# Altium PCB SG_CAN_Board.PcbDoc (part 2 of 2)
Units mil, origin at the board's own origin, x right, y up, seen from the top; angles counter-clockwise.
Board outline 3500 x 2800 mil, 4 copper layers (Top Layer, Int1 (GND), Int2 (PWR), Bottom Layer), stack 53.911 mil thick; 153 components, 115 nets, 475 pads, 128 vias.
Unrouted connection lines stored in the file: 15.
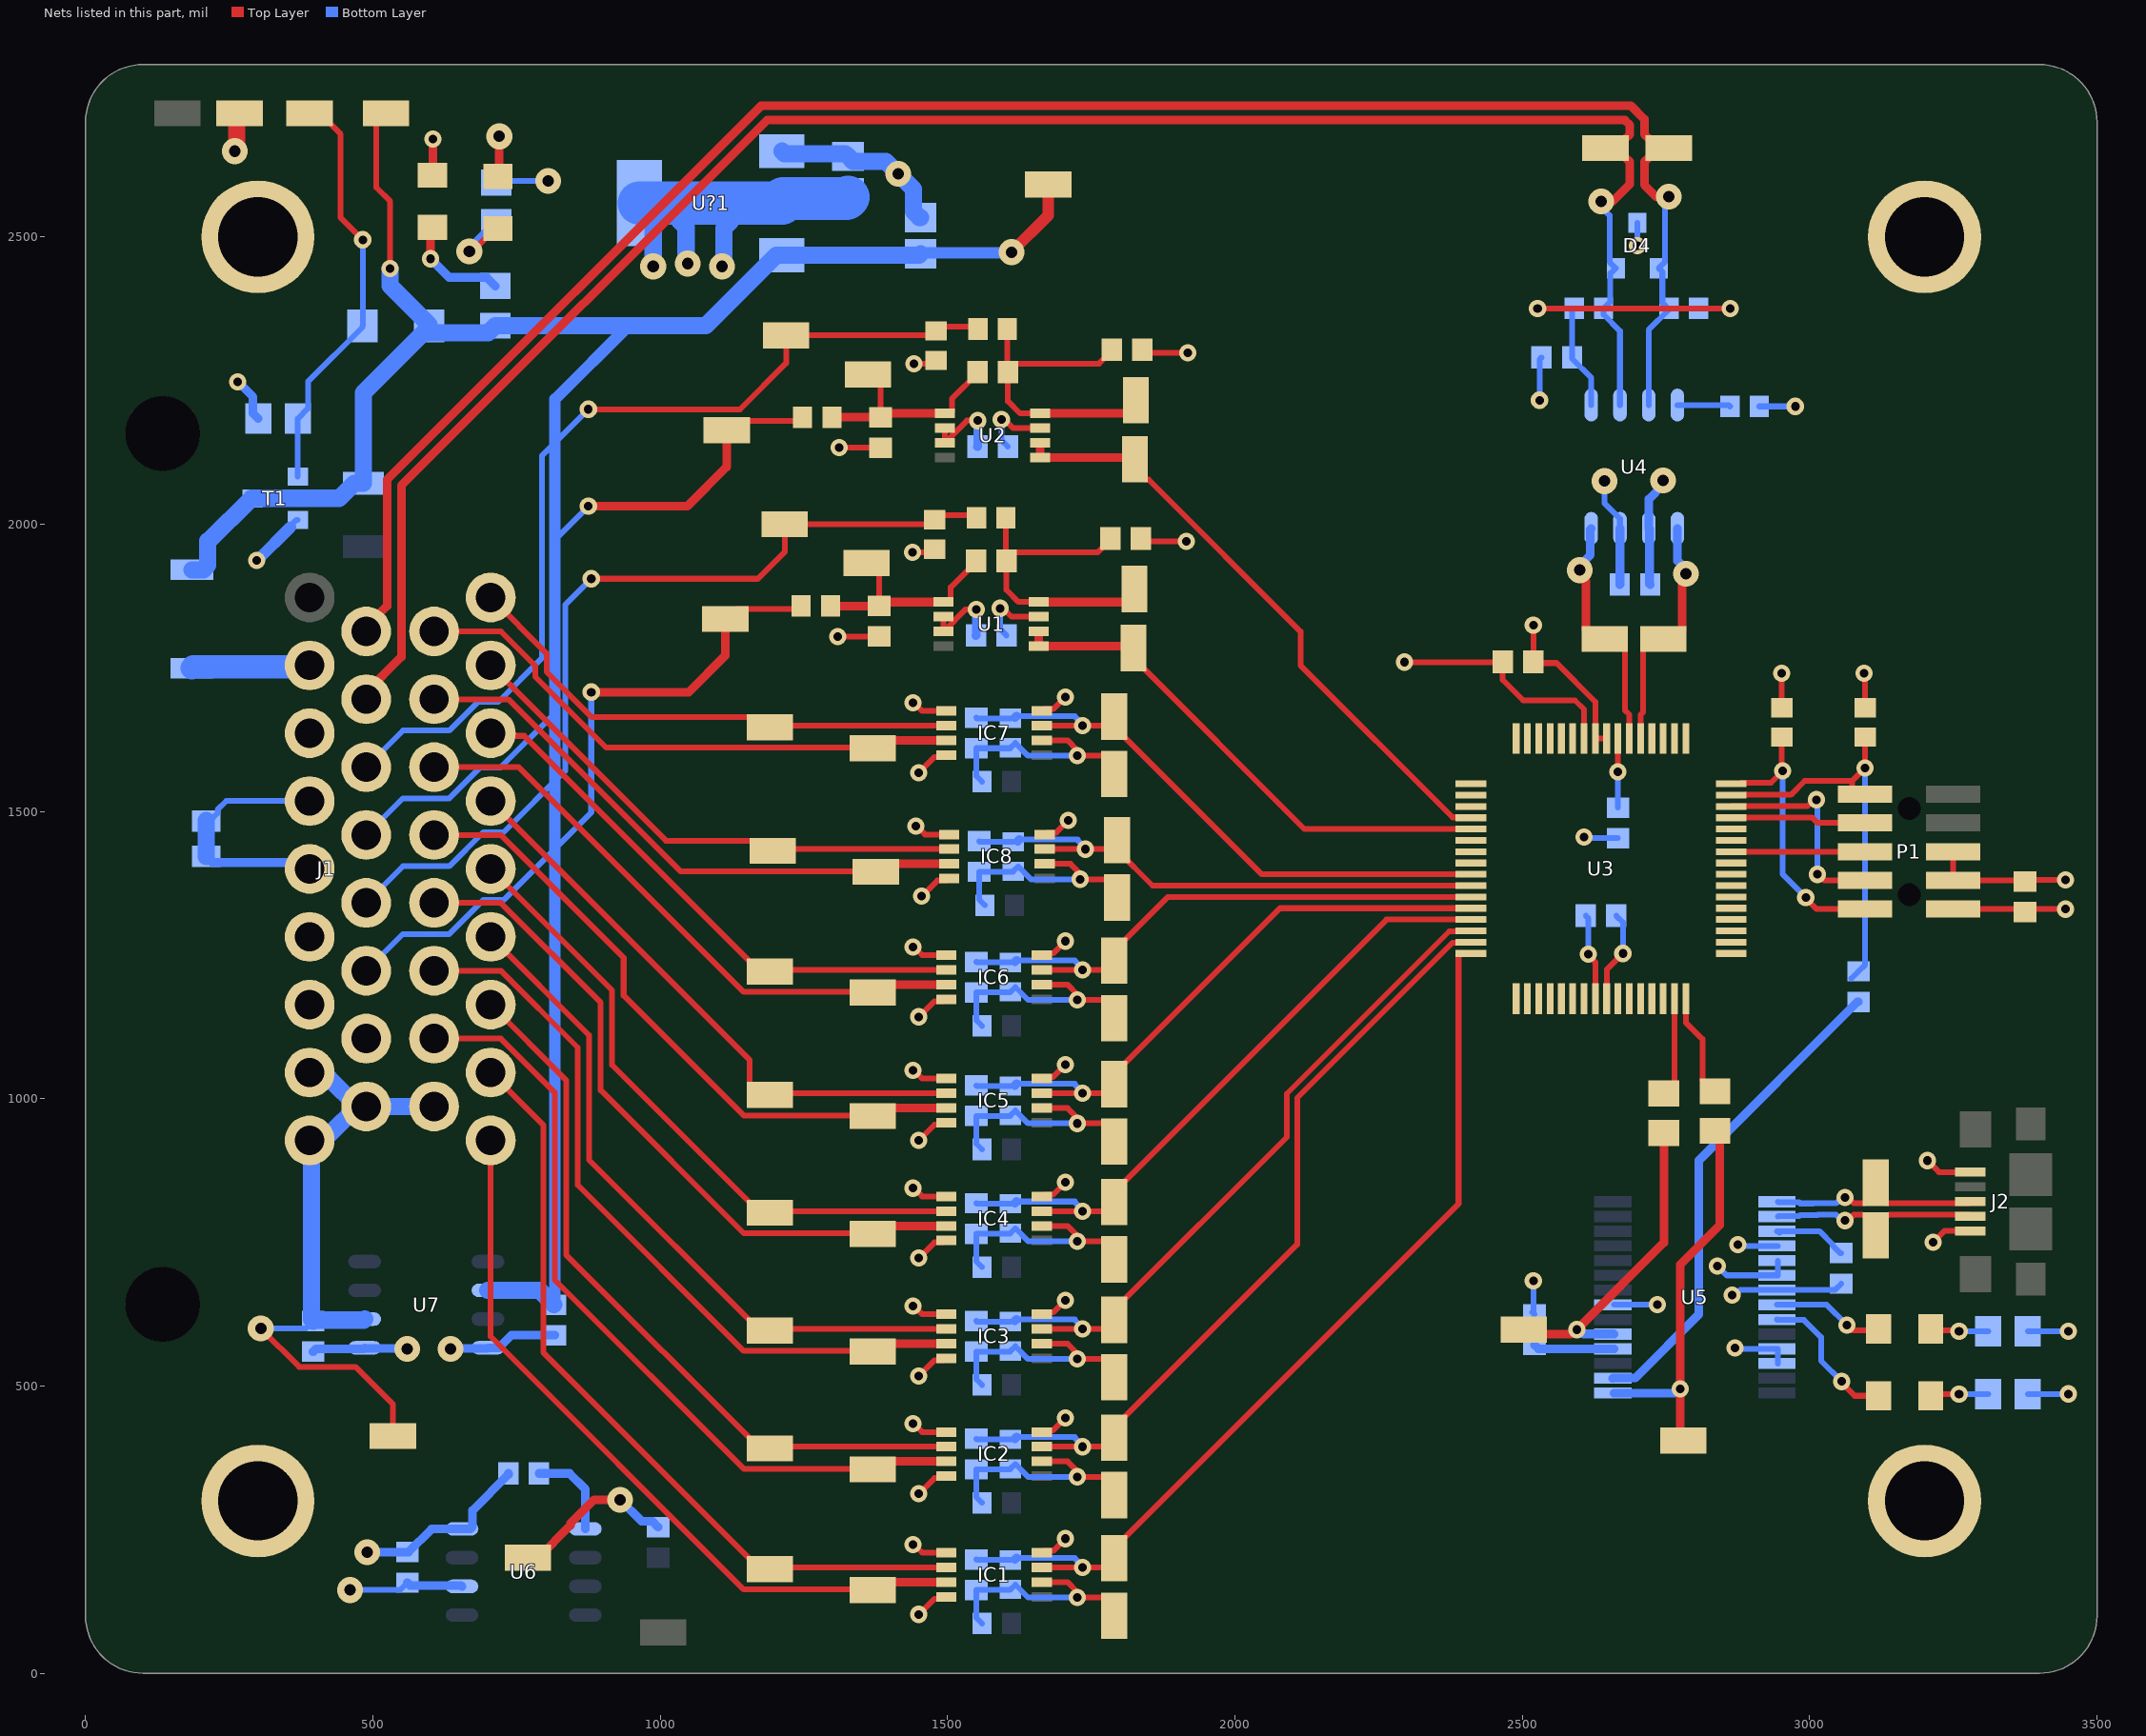
[diagram p4: the nets of this part, all layers, seen from the top]

## Via types
v1: diameter 30, hole 15, Top Layer to Bottom Layer, 106 vias
v2: diameter 45, hole 20, Top Layer to Bottom Layer, 22 vias

## Nets (pads, with @x,y where several pads share a name; then routed paths per layer and width w, separated by ;. In a path a pad name is that pad's centre, name@x,y a point inside that pad or via, vN(x,y) a via of type N, cw(c..) or ccw(c..) an arc to the next point about the centre after c; other vN are vias at no path point) (continued)
+12: 12V.1 C16.2 C31.2 D5.2 D6.2 F1.2 R33.2 T1.3 TP47.1 U7.2 U?1.3 | length 4223.1
  Top Layer w10: 12V.1@522.68,2715 506.08,2698.4 506.08,2585.85 530,2561.92 v1(530,2445)
  Top Layer w20: v2(1611.1,2473.44) 1675,2537.34 TP47.1@1675,2591.38
  Bottom Layer w20: C16.2@814.99,641.5 C16.2@816.96,641.5 818.92,641.5 816.96,643.47 816.96,2217.51 945,2345.55 ; C31.2@1453.01,2470.83 1454.32,2472.14 1609.79,2472.14 v2(1611.1,2473.44)
  Bottom Layer w30: D6.2@185,1920.63 204.68,1920.63 212.4,1928.35 212.4,1970.64 214.3,1970.64 288.66,2045 T1.3@290.63,2045 441.44,2045 467.56,2071.12 F1.2@483.31,2071.12 483.31,2228.27 598.07,2343.03 D5.2@598.07,2345 598.07,2346.97 530,2415.04 v1(530,2445) ; D5.2@598.07,2332.91 700.25,2332.91 R33.2@712.89,2345.55 945,2345.55 1079.39,2345.55 1201.95,2468.11 U?1.3@1211.79,2468.11 ; U7.2@700.28,666.57 789.91,666.57 C16.2@814.99,641.5 ; U?1.3@1213.11,2468.11 1450.3,2468.11 C31.2@1453.01,2470.83
+IN_U_ThermoAmp1: C4.2 C6.1 R6.1 TP27.1 U2.8 | length 570.5
  Top Layer w10: R6.1@1603.95,2339.63 1603.95,2265.62 C4.2@1604.93,2264.63 ; U2.8@1661.25,2193.02 1626,2193.02 1604.93,2214.08 C4.2@1604.93,2264.63 ; C6.1@1785.9,2303.56 1785.9,2301.59 1763.62,2279.32 1617.65,2279.32 1604.93,2266.6 C4.2@1604.93,2264.63
  Top Layer w15: U2.8@1661.25,2193.02 1812.33,2193.02 1827.47,2208.16 TP27.1@1827.47,2215.74
+IN_U_ThermoAmp2: C3.2 C5.1 R5.1 TP25.1 U1.8 | length 570.5
  Top Layer w10: R5.1@1601.48,2011.07 1601.48,1937.06 C3.2@1602.46,1936.07 ; U1.8@1658.78,1864.46 1623.53,1864.46 1602.46,1885.52 C3.2@1602.46,1936.07 ; C5.1@1783.43,1975 1783.43,1973.03 1761.15,1950.76 1615.18,1950.76 1602.46,1938.04 C3.2@1602.46,1936.07
  Top Layer w15: U1.8@1658.78,1864.46 1809.86,1864.46 1825,1879.6 TP25.1@1825,1887.18
-IN_U_ThermoAmp1: C2.2 C4.1 R2.2 TP15.1 U2.1 | length 399.4
  Top Layer w10: TP15.1@1361.64,2260.71 1365.72,2260.71 1383.36,2243.07 1383.36,2193.02 C2.2@1383.36,2186.21 ; U2.1@1495.47,2193.02 U2.1@1504.7,2193.02 ; C4.1@1551.78,2264.63 1551.78,2262.66 1507.97,2218.85 U2.1@1507.97,2196.29 ; U2.1@1504.7,2193.02 U2.1@1507.97,2196.29 ; U2.1@1504.7,2193.02 U2.1@1507.97,2196.29 ; U2.1@1504.7,2193.02 U2.1@1507.97,2196.29 ; U2.1@1504.7,2193.02 U2.1@1507.97,2196.29
  Top Layer w15: R2.2@1298.95,2186.21 C2.2@1383.36,2186.21 1390.17,2193.02 U2.1@1495.47,2193.02
-IN_U_ThermoAmp2: C1.2 C3.1 R1.2 TP14.1 U1.1 | length 385.6
  Top Layer w10: TP14.1@1359.17,1932.15 1363.25,1932.15 1380.89,1914.52 1380.89,1864.46 C1.2@1380.89,1857.65 ; U1.1@1493,1864.46 1502.23,1864.46 1505.5,1867.73 1505.5,1890.29 1549.31,1934.11 C3.1@1549.31,1936.07
  Top Layer w15: R1.2@1296.48,1857.65 C1.2@1380.89,1857.65 1387.7,1864.46 U1.1@1493,1864.46
AGND: C1.1 C2.1 C5.2 C6.2 C7.1 C10.1 C13.1 C16.1 C17.1 C20.1 C21.1 C22.1 IC1.1 IC1.4 IC2.1 IC2.4 IC3.1 IC3.4 IC4.1 IC4.4 IC5.1 IC5.4 IC6.1 IC6.4 IC7.1 IC7.4 IC8.1 IC8.4 J1.A24 J1.A30 J1.A31 J1.A32 N1.1 R3.1 R4.1 TP44.1 U1.2 U1.3 U2.2 U2.3 U3.10 U6.4 U7.4 U7.5 | length 3265.3
  Top Layer w10: v1(1308.64,1804.5) C1.1@1380.89,1804.5 ; v1(1311.11,2133.06) C2.1@1383.36,2133.06 ; v1(1438.85,1950.76) 1471.49,1950.76 R3.1@1477.3,1956.56 ; v1(1440,224.36) 1441.45,224.36 1455.86,209.96 IC1.1@1498.09,209.96 ; v1(1440,434.36) 1441.45,434.36 1455.86,419.96 IC2.1@1498.09,419.96 ; v1(1440,639.36) 1441.45,639.36 1455.86,624.96 IC3.1@1498.09,624.96 ; v1(1440,844.36) 1441.45,844.36 1455.86,829.96 IC4.1@1498.09,829.96 ; v1(1440,1049.36) 1441.45,1049.36 1455.86,1034.96 IC5.1@1498.09,1034.96 ; v1(1440,1264.36) 1441.45,1264.36 1455.86,1249.96 IC6.1@1498.09,1249.96 ; v1(1440,1689.36) 1441.45,1689.36 1455.86,1674.96 IC7.1@1498.09,1674.96 ; v1(1441.32,2279.32) 1473.96,2279.32 R4.1@1479.77,2285.12 ; v1(1445,1474.36) 1446.45,1474.36 1460.86,1459.96 IC8.1@1503.09,1459.96 ; v1(1450,102.59) 1477.32,129.92 1494.82,129.92 IC1.4@1498.09,133.19 ; v1(1450,312.59) 1477.32,339.92 1494.82,339.92 IC2.4@1498.09,343.19 ; v1(1450,517.59) 1477.32,544.92 1494.82,544.92 IC3.4@1498.09,548.19 ; v1(1450,722.59) 1477.32,749.92 1494.82,749.92 IC4.4@1498.09,753.19 ; v1(1450,927.59) 1477.32,954.92 1494.82,954.92 IC5.4@1498.09,958.19 ; v1(1450,1142.59) 1477.32,1169.92 1494.82,1169.92 IC6.4@1498.09,1173.19 ; v1(1450,1567.59) 1477.32,1594.92 1494.82,1594.92 IC7.4@1498.09,1598.19 ; v1(1455,1352.59) 1482.32,1379.92 1499.82,1379.92 IC8.4@1503.09,1383.19 ; U1.2@1493,1838.87 U1.3@1493,1813.28 1531.38,1851.66 v1(1550.3,1851.66) ; U2.2@1495.47,2167.43 U2.3@1495.47,2141.84 1533.85,2180.22 v1(1552.77,2180.22) ; C5.2@1836.57,1975 1841.57,1970 v1(1915.22,1970) ; C6.2@1839.04,2303.56 1844.04,2298.56 v1(1917.69,2298.56) ; v1(2295,1759.97) 2465.69,1759.97 C7.1@2466.07,1760.35 2466.07,1728.92 2501.65,1693.35 2591.65,1693.35 2607.49,1677.51 U3.10@2607.49,1626.85
  Top Layer w15: TP44.1@770,201.34 787.72,201.34 843.93,257.55 843.93,261.05 885,302.12 v2(930,302.12)
  Top Layer w30: J1.A24@477.59,1115.56 J1.A24@488.43,1104.72
  Bottom Layer w15: N1.1@210,1422.2 221.1,1411.1 378.9,1411.1 J1.A30@390,1400 ; C20.1@396.03,559.88 401.07,564.93 484.06,564.93 U7.5@485.71,566.57 486.77,565.52 558.94,565.52 v2(560,564.46) ; v2(490,210.94) C10.1@560,210.94 561.97,210.94 602.37,251.34 U6.4@655.1,251.34 669.5,251.34 673.48,255.32 673.48,283.62 735.81,345.95 C13.1@735.81,347.91 ; v2(635,564.46) 636.06,565.52 699.22,565.52 U7.4@700.28,566.57 719.34,566.57 741.12,588.35 C16.1@816.96,588.35 ; v2(930,302.12) 967.42,264.71 986.14,264.71 C17.1@996.36,254.49 ; C22.1@1549.31,1806.39 1549.81,1806.88 1549.81,1851.17 v1(1550.3,1851.66) ; C21.1@1551.78,2134.95 1552.28,2135.44 1552.28,2179.73 v1(1552.77,2180.22)
CAN_N: CANH.1 D4.2 J1.A19 R14.1 U4.6 | length 3413.7
  Top Layer w15: J1.A19@488.43,1695.28 488.43,1707.75 549.73,1769.05 549.73,2067.18 1185.9,2703.36 2678.53,2703.36 2687.32,2694.57 2687.32,2678.36 2678.53,2669.57 2659.77,2669.57 CANH.1@2644.63,2654.43 2659.77,2639.3 2678.53,2639.3 2687.32,2630.51 2687.32,2591.83 2657.32,2561.83 v2(2637.01,2561.83)
  Bottom Layer w10: v2(2637.01,2561.83) 2637.01,2552.36 2651.85,2537.52 2651.85,2456.38 D4.2@2662.6,2445.63 2653.35,2436.38 2653.35,2387.37 R14.1@2641.62,2375.64 2641.62,2364.49 2670,2336.11 U4.6@2670,2207.28
  Bottom Layer w15: v2(2637.01,2561.83) v2@2639.32,2559.53
CAN_P: CANL.1 D4.1 J1.A18 R15.2 U4.7 | length 3361.5
  Top Layer w15: J1.A18@488.43,1813.39 488.43,1821.42 524.73,1857.72 524.73,2077.54 1175.55,2728.36 2688.88,2728.36 2712.32,2704.93 2712.32,2678.36 2721.1,2669.57 2739.86,2669.57 CANL.1@2755,2654.43 2739.86,2639.3 2721.1,2639.3 2712.32,2630.51 2712.32,2590.45 2732.76,2570 v2(2755,2570)
  Bottom Layer w10: U4.7@2720,2207.28 2720,2338.23 2755.44,2373.67 2743.7,2385.4 2743.7,2439.33 D4.1@2737.4,2445.63 2748.15,2456.38 2748.15,2553.68 2755,2560.53 v2(2755,2570)
  Bottom Layer w15: v2(2755,2570) v2@2755.22,2569.78
D_N: J2.2 TEST_USBD_N1.1 U5.16 | length 378.1
  Top Layer w10: v1(3061.47,788.02) 3066.88,788.02 3076.88,798.02 3091.5,798.02 3091.88,797.64 3097.36,797.64 TEST_USBD_N1.1@3115,780.01 ; TEST_USBD_N1.1@3115,762.29 TEST_USBD_N1.1@3115,780.01 ; J2.2@3279.69,795.39 3276.97,798.11 3246.9,798.11 3246.82,798.19 3226.82,798.19 3226.65,798.02 3138.5,798.02 3138.12,797.64 3132.64,797.64 TEST_USBD_N1.1@3115,780.01
  Bottom Layer w10: U5.16@2945,795 2945.94,795.94 2981.55,795.94 2983.4,797.8 3014.39,797.8 3014.62,798.02 3046.06,798.02 3056.06,788.02 v1(3061.47,788.02)
D_P: J2.3 TEST_USBD_P1.1 U5.15 | length 378.1
  Top Layer w10: v1(3061.47,828.02) 3066.88,828.02 3076.88,818.02 3091.5,818.02 3091.88,818.4 3097.36,818.4 TEST_USBD_P1.1@3115,836.04 ; TEST_USBD_P1.1@3115,853.76 TEST_USBD_P1.1@3115,836.04 ; J2.3@3279.69,820.98 3276.97,818.27 3246.9,818.27 3246.82,818.19 3218.53,818.19 3218.37,818.02 3138.5,818.02 3138.12,818.4 3132.64,818.4 TEST_USBD_P1.1@3115,836.04
  Bottom Layer w10: U5.15@2945,820.59 2945.94,819.65 2981.55,819.65 2983.4,817.8 3006.11,817.8 3006.34,818.02 3046.06,818.02 3056.06,828.02 v1(3061.47,828.02)
DGND: C8.1 C9.1 C11.1 C12.1 C14.1 C15.1 C18.1 C31.1 C32.1 D1.2 D4.3 D6.1 J1.A27 J1.A28 J1.A29 J2.5 N1.2 P1.3 P1.5 pad.1 POW.2 R13.1 R34.1 T1.2 U3.40 U4.2 U5.7 U5.18 U5.21 U5.25 U5.26 U?1.1 | length 2450.2
  Top Layer w10: v1(2615.1,1251.93) 2615.1,1249.96 2627.17,1237.88 U3.40@2627.17,1174.09 ; v1(3205,892.36) 3225.19,872.17 J2.5@3279.69,872.17 ; P1.5@3250,1430 P1.3@3250,1380 3372.48,1380 C8.1@3374.65,1377.83 3377.6,1380.79 v1(3445,1380.79)
  Top Layer w15: POW.2@603.58,2607.2 604.35,2607.97 v1(604.35,2670.51) ; D1.2@717.59,2605.28 720,2607.69 v2(720,2675)
  Bottom Layer w10: N1.2@210,1483.22 215.91,1483.22 229.61,1496.92 229.61,1502.83 244.89,1518.11 J1.A29@390,1518.11 ; v1(297.6,1937.22) v1@299,1937.22 ; T1.2@356.65,1994.88 356.65,1996.85 367.4,2007.6 T1.2@369.37,2007.6 ; v1(2519.22,683.26) 2519.22,630.6 2517.29,628.66 C18.1@2521.14,624.8 ; v1(2530,2215.74) 2530,2286.66 C12.1@2533.51,2290.16 ; v1(2607.49,1455.35) 2609.41,1453.43 C14.1@2666.54,1453.43 ; C15.1@2610.44,1318.58 2615.1,1313.92 v1(2615.1,1251.93) ; U5.7@2659.57,641.46 v1(2735,641.46) ; v1(2700,2485) D4.3@2700,2524.37 ; v1(2865,658.23) 2870.41,658.23 2879.23,667.05 U5.21@2942.85,667.05 3043.82,667.05 C11.1@3055,678.23 ; v1(2870.41,566.45) 2872.18,564.69 U5.25@2942.85,564.69 2945,564.69 U5.26@2945,539.09 ; v1(2875,746.38) 2877.57,743.82 U5.18@2942.85,743.82 U5.18@2945,743.82 ; R13.1@2912.6,2205 v1(2975,2205)
  Bottom Layer w15: v1(265,2248.01) 291.52,2221.49 291.52,2192.81 R34.1@300.55,2183.78 ; C9.1@2722.64,1895 2721.32,1896.32 2721.32,1991.39 2720.34,1992.38 2720.34,2043.76 2744.73,2068.15 v2(2744.73,2076.27)
  Bottom Layer w20: v1@299,1937.22 T1.2@356.65,1994.88
  Bottom Layer w30: U?1.1@1211.79,2649.21 1216.32,2644.68 1322.29,2644.68 C32.1@1326.81,2640.16 1335.41,2631.57 1392.29,2631.57 v2(1413.85,2610) 1440.46,2583.4 1440.46,2544.41 1451.05,2533.82 C31.1@1453.01,2533.82
  Bottom Layer w40: D6.1@185,1749.37 187.28,1751.65 387.32,1751.65 J1.A27@390,1754.33
DVCC_5V: C7.2 C8.2 C9.2 C10.2 C14.2 C15.2 C18.2 C21.2 C22.2 C32.2 IC1.8 IC2.8 IC3.8 IC4.8 IC5.8 IC6.8 IC7.8 IC8.8 J2.1 P1.1 R9.2 R10.2 R11.2 R12.2 R32.1 TP1.1 U1.7 U2.7 U3.7 U3.8 U3.9 U3.41 U4.3 U5.4 U5.19 U5.20 U6.2 U?1.2 U?1.THM | length 3255.9
  Top Layer w10: v1(1591.12,1853.59) 1596.54,1853.59 1611.26,1838.87 U1.7@1658.78,1838.87 ; v1(1593.59,2182.15) 1599.01,2182.15 1613.73,2167.43 U2.7@1661.25,2167.43 ; IC1.8@1663.88,209.96 1667.07,213.15 1683.79,213.15 v1(1705,234.36) ; IC2.8@1663.88,419.96 1667.07,423.15 1683.79,423.15 v1(1705,444.36) ; IC3.8@1663.88,624.96 1667.07,628.15 1683.79,628.15 v1(1705,649.36) ; IC4.8@1663.88,829.96 1667.07,833.15 1683.79,833.15 v1(1705,854.36) ; IC5.8@1663.88,1034.96 1667.07,1038.15 1683.79,1038.15 v1(1705,1059.36) ; IC6.8@1663.88,1249.96 1667.07,1253.15 1683.79,1253.15 v1(1705,1274.36) ; IC7.8@1663.88,1674.96 1667.07,1678.15 1683.79,1678.15 v1(1705,1699.36) ; IC8.8@1668.88,1459.96 1672.07,1463.15 1688.79,1463.15 v1(1710,1484.36) ; v1(2519.22,1823.97) C7.2@2519.22,1760.35 2521.22,1758.35 2559.65,1758.35 2627.17,1690.82 U3.9@2627.17,1626.85 U3.8@2646.86,1626.85 ; U3.41@2646.86,1174.09 2646.86,1224.69 v1(2675,1252.83) ; v1(2666.54,1568.78) U3.7@2666.54,1626.85 ; R9.2@2951.51,1680.47 v1(2951.51,1740.83) ; v1(3094.65,1740.83) 3096.46,1739.02 R10.2@3096.46,1680.47 ; v1(3215,750.4) 3234.41,769.8 J2.1@3279.69,769.8 ; P1.1@3250,1330 3369.33,1330 C8.2@3374.65,1324.69 3379.96,1330 v1(3445,1330)
  Top Layer w30: v2(260,2649.21) 262.87,2652.08 262.87,2709.8 TP1.1@268.07,2715
  Bottom Layer w10: v2(460,145) 497.5,145 497.58,145.08 547.28,145.08 C10.2@560,157.79 ; R32.1@715,2594.45 717.95,2597.4 v2(805,2597.4) ; v1(1591.12,1853.59) 1591.12,1817.73 C22.2@1602.46,1806.39 ; v1(1593.59,2182.15) 1593.59,2146.29 C21.2@1604.93,2134.95 ; v2(2642.92,2075) 2642.92,2036.53 2670,2009.45 U4.3@2670,1992.72 ; C15.2@2663.59,1318.58 2675,1307.17 v1(2675,1252.83) ; C14.2@2666.54,1506.57 v1(2666.54,1568.78) ; v1(2839.61,708.9) 2855.87,692.64 U5.20@2942.85,692.64 ; U5.20@2945,692.64 U5.19@2945,718.23 ; R11.2@3379.45,486.26 v1(3450,486.26) ; R12.2@3379.45,595 v1(3450,595)
  Bottom Layer w15: C10.2@560,157.79 564.8,152.99 653.45,152.99 U6.2@655.1,151.34 ; C18.2@2521.14,571.65 2528.11,564.69 U5.4@2659.57,564.69 ; C9.2@2669.49,1895 2670,1895.51 U4.3@2670,1992.72
  Bottom Layer w30: v2(987.78,2448.66) U?1.THM@987.78,2513.66 ; 1032.78,2558.66 1032.78,2528.66 1044.91,2516.53 1044.91,2456.53 v2(1047.78,2453.66) ; v2(1107.78,2448.66) 1110.65,2451.53 1110.65,2515.59 1122.28,2527.23 1122.28,2558.66
  Bottom Layer w75: U?1.THM@963.76,2558.66 1032.78,2558.66 1122.28,2558.66 U?1.2@1211.79,2558.66 1211.79,2564.76 1213.66,2566.63 1324.38,2566.63 C32.2@1326.81,2569.07
FTDI_GREEN: D3.2 U5.23 | length 257.7
  Top Layer w10: v1(3056.06,507.91) 3056.06,505.41 3078.48,482.99 D3.2@3120,482.99
  Bottom Layer w10: U5.23@2942.85,615.87 2943.8,614.92 2990.08,614.92 3020,585 3020,543.97 v1(3056.06,507.91)
FTDI_RED: D2.2 U5.22 | length 196
  Top Layer w10: v1(3065,606.03) 3065,605.23 3073.24,597 D2.2@3120,597
  Bottom Layer w10: U5.22@2942.85,641.46 3029.57,641.46 v1(3065,606.03)
FTDI_UART_RX: R7.2 U3.47 | length 173
  Top Layer w10: R7.2@2746.27,1009.45 2747.33,1009.45 2764.97,1027.09 U3.47@2764.97,1174.09
FTDI_UART_TX: R8.2 U3.48 | length 184.3
  Top Layer w10: U3.48@2784.65,1174.09 2784.65,1132.52 2813.43,1103.75 2813.43,1030.55 2831.06,1012.91 R8.2@2835,1012.91
JTAG_RST: C19.2 P1.10 R10.1 U3.63 | length 755.2
  Top Layer w10: U3.63@2863.39,1528.43 2884.34,1528.43 2884.97,1529.06 2967.29,1529.06 2991.11,1552.87 3073.59,1552.87 ; R10.1@3096.46,1629.29 v1(3096.46,1575.74) 3073.59,1552.87 ; P1.10@3128.74,1530 3083.55,1530 3073.59,1539.96 3073.59,1552.87
  Bottom Layer w10: C19.2@3072.28,1209 C19.2@3085,1221.71 3096.46,1233.17 v1(3096.46,1575.74)
JTAG_TCLK: P1.4 U3.62 | length 371.2
  Top Layer w10: U3.62@2863.39,1508.74 2863.71,1509.06 2996.11,1509.06 3007.53,1520.47 v1(3011.97,1520.47) ; v1(3013.7,1390.47) 3014.65,1390.47 3025.12,1380 P1.4@3096.46,1380
  Bottom Layer w10: v1(3011.97,1520.47) 3013.7,1518.74 v1(3013.7,1390.47)
JTAG_TDI: P1.8 U3.61 | length 236.8
  Top Layer w10: U3.61@2863.39,1489.06 3004.65,1489.06 3013.7,1480 P1.8@3096.46,1480
JTAG_TDO: P1.6 U3.58 | length 233.1
  Top Layer w10: U3.58@2863.39,1430 P1.6@3096.46,1430
JTAG_TMS: P1.2 R9.1 U3.64 | length 507.8
  Top Layer w10: U3.64@2863.39,1548.43 2878.73,1548.43 2880.3,1550 2932.76,1550 v1(2953.23,1570.47) 2951.51,1572.19 R9.1@2951.51,1629.29 ; v1(2993.23,1350.47) 2993.23,1348.74 3011.97,1330 P1.2@3096.46,1330
  Bottom Layer w10: v1(2953.23,1570.47) 2953.23,1390.47 v1(2993.23,1350.47)
NetC22_1: C19.1 U5.2 | length 855.8
  Bottom Layer w15: U5.2@2657.42,513.5 2657.87,513.95 2696.32,513.95 2807.11,624.73 2807.11,892.64 3083.03,1168.56 C19.1@3085,1168.56
NetD1_1: D3.1 R11.1 | length 101.4
  Top Layer w10: D3.1@3210.55,482.99 3213.33,485.77 v1(3260,485.77)
  Bottom Layer w10: v1(3260,485.77) 3310.06,485.77 R11.1@3310.55,486.26
NetD3_1: D2.1 R12.1 | length 100.8
  Top Layer w10: D2.1@3210.55,597 3258.51,597 v1(3260,595.51)
  Bottom Layer w10: v1(3260,595.51) 3310.04,595.51 R12.1@3310.55,595
NetD6_1: D5.1 OVP_G1.1 R34.2 T1.1 | length 728
  Top Layer w10: OVP_G1.1@390,2715 407.72,2715 443.94,2678.78 443.94,2533.39 v1(482.32,2495)
  Bottom Layer w10: T1.1@369.37,2082.4 369.37,2183.7 R34.2@369.45,2183.78 387.09,2201.42 387.09,2248.19 481.93,2343.03 D5.1@481.93,2345 482.32,2345.39 v1(482.32,2495)
NetPOWER1_1: POW.1 R33.1 | length 189
  Top Layer w15: v1(600.31,2461.92) 600.31,2511.83 604.35,2515.88 POW.1@603.58,2516.65
  Bottom Layer w15: v1(600.31,2461.92) 632.64,2429.59 697.75,2429.59 R33.1@712.89,2414.45
NetR7_1: R7.1 U5.5 UART_RX1.1 | length 558.7
  Top Layer w15: UART_RX1.1@2502.44,598.23 2510.39,590.28 v1@2585,590.28 ; v1(2595,598.22) 2746.27,749.49 R7.1@2746.27,940.55
  Bottom Layer w15: v1(2595,598.22) 2599.06,598.22 2606.56,590.72 2659.12,590.72 U5.5@2659.57,590.28
NetR9_1: R8.1 U5.1 UART_TX1.1 | length 691.4
  Top Layer w15: UART_TX1.1@2780,405 2775,410 v1(2775,495) 2775,711.5 2843.5,780.01 2843.5,935.51 R8.1@2835,944.02
  Bottom Layer w15: U5.1@2659.57,487.91 2763.85,487.91 2770.94,495 v1(2775,495)
NetU2_1: U3.1
NetU2_2: U3.2
NetU2_3: U3.3
NetU2_4: U3.4
NetU2_11: U3.11
NetU2_12: U3.12
NetU2_13: U3.13
NetU2_14: U3.14
NetU2_15: U3.15
NetU2_16: U3.16
NetU2_17: U3.17
NetU2_18: U3.18
NetU2_19: U3.19
NetU2_20: U3.49
NetU2_21: U3.50
NetU2_22: U3.22
NetU2_23: U3.23
NetU2_24: U3.24
NetU2_27: U3.38
NetU2_28: U3.37
NetU2_29: U3.34
NetU2_30: U3.33
NetU2_35: U3.35
NetU2_36: U3.36
NetU2_39: U3.39
NetU2_42: U3.42
NetU2_43: U3.43
NetU2_44: U3.44
NetU2_45: U3.45
NetU2_46: U3.46
NetU2_51: U3.51
NetU2_52: U3.52
NetU2_53: U3.53
NetU2_54: U3.54
NetU2_55: U3.55
NetU2_56: U3.56
NetU2_57: U3.57
NetU2_59: U3.59
NetU2_60: U3.60
RG_SG_Amp1: C30.1 IC7.6 R24.1 R31.2 TP34.1 | length 401.2
  Top Layer w10: IC7.6@1663.88,1623.78 1708.69,1623.78 1725.51,1606.96 v1(1725.51,1597.05) 1772.36,1597.05 TP34.1@1790,1579.41
  Bottom Layer w10: R31.2@1559.92,1551.85 1550,1561.77 C30.1@1550,1610 1608.55,1610 R24.1@1609.53,1610.98 1617.91,1619.37 1640.23,1597.05 v1(1725.51,1597.05)
RG_SG_Amp2: C23.1 IC8.6 R16.1 R17.2 TP42.1 | length 401.2
  Top Layer w10: IC8.6@1668.88,1408.78 1713.69,1408.78 1730.51,1391.96 v1(1730.51,1382.05) 1777.36,1382.05 TP42.1@1795,1364.41
  Bottom Layer w10: R17.2@1564.92,1336.85 1555,1346.77 C23.1@1555,1395 1613.55,1395 R16.1@1614.53,1395.98 1622.91,1404.37 1645.23,1382.05 v1(1730.51,1382.05)
RG_SG_Amp3: C29.1 IC6.6 R23.1 R30.2 TP33.1 | length 401.2
  Top Layer w10: IC6.6@1663.88,1198.78 1708.69,1198.78 1725.51,1181.96 v1(1725.51,1172.05) 1772.36,1172.05 TP33.1@1790,1154.41
  Bottom Layer w10: R30.2@1559.92,1126.85 1550,1136.77 C29.1@1550,1185 1608.55,1185 R23.1@1609.53,1185.98 1617.91,1194.37 1640.23,1172.05 v1(1725.51,1172.05)
RG_SG_Amp4: C28.1 IC5.6 R22.1 R29.2 TP32.1 | length 401.2
  Top Layer w10: IC5.6@1663.88,983.78 1708.69,983.78 1725.51,966.96 v1(1725.51,957.05) 1772.36,957.05 TP32.1@1790,939.41
  Bottom Layer w10: R29.2@1559.92,911.85 1550,921.77 C28.1@1550,970 1608.55,970 R22.1@1609.53,970.98 1617.91,979.37 1640.23,957.05 v1(1725.51,957.05)
RG_SG_Amp5: C27.1 IC4.6 R21.1 R28.2 TP31.1 | length 401.2
  Top Layer w10: IC4.6@1663.88,778.78 1708.69,778.78 1725.51,761.96 v1(1725.51,752.05) 1772.36,752.05 TP31.1@1790,734.41
  Bottom Layer w10: R28.2@1559.92,706.85 1550,716.77 C27.1@1550,765 1608.55,765 R21.1@1609.53,765.98 1617.91,774.37 1640.23,752.05 v1(1725.51,752.05)
RG_SG_Amp6: C26.1 IC3.6 R20.1 R27.2 TP30.1 | length 401.2
  Top Layer w10: IC3.6@1663.88,573.78 1708.69,573.78 1725.51,556.96 v1(1725.51,547.05) 1772.36,547.05 TP30.1@1790,529.41
  Bottom Layer w10: R27.2@1559.92,501.85 1550,511.77 C26.1@1550,560 1608.55,560 R20.1@1609.53,560.98 1617.91,569.37 1640.23,547.05 v1(1725.51,547.05)
RG_SG_Amp7: C25.1 IC2.6 R19.1 R26.2 TP29.1 | length 401.2
  Top Layer w10: IC2.6@1663.88,368.78 1708.69,368.78 1725.51,351.96 v1(1725.51,342.05) 1772.36,342.05 TP29.1@1790,324.41
  Bottom Layer w10: R26.2@1559.92,296.85 1550,306.77 C25.1@1550,355 1608.55,355 R19.1@1609.53,355.98 1617.91,364.37 1640.23,342.05 v1(1725.51,342.05)
RG_SG_Amp8: C24.1 IC1.6 R18.1 R25.2 TP28.1 | length 401.2
  Top Layer w10: IC1.6@1663.88,158.78 1708.69,158.78 1725.51,141.96 v1(1725.51,132.05) 1772.36,132.05 TP28.1@1790,114.41
  Bottom Layer w10: R25.2@1559.92,86.85 1550,96.77 C24.1@1550,145 1608.55,145 R18.1@1609.53,145.98 1617.91,154.37 1640.23,132.05 v1(1725.51,132.05)
RXCAN: CANRX.1 U3.6 U4.4 | length 430.6
  Top Layer w10: CANRX.1@2643.65,1800.35 2661.36,1800.35 2679,1782.71 2679,1675.65 2686.23,1668.43 U3.6@2686.23,1626.85
  Top Layer w15: v2(2600,1920) 2600,1911.88 2610.79,1901.09 2610.79,1815.48 2625.93,1800.35 CANRX.1@2643.65,1800.35
  Bottom Layer w15: v2(2600,1920) 2600,1928.12 2618.35,1946.47 2618.35,1991.07 U4.4@2620,1992.72
SG5V: C20.2 J1.A17 J1.A25 J1.A33 J1.A34 TP46.1 U7.6 | length 1193.1
  Top Layer w10: v2(305,600) 371.69,533.31 470,533.31 535,468.31 TP46.1@535,413.07
  Bottom Layer w10: v2(305,600) 342.5,600 342.81,600.31 383.31,600.31 C20.2@396.03,613.03
  Bottom Layer w30: J1.A33@390,1045.67 400.83,1034.84 424.88,1034.84 J1.A25@473.11,986.61 ; U7.6@485.71,616.57 483.94,614.8 397.8,614.8 C20.2@396.03,613.03 395.73,613.03 393.01,615.75 393.01,924.55 J1.A34@390,927.56 400.83,938.39 424.88,938.39 J1.A25@473.11,986.61 ; J1.A17@606.54,986.61 J1.A25@488.43,986.61 J1.A25@473.11,986.61
SG+1: IC7.3 J1.A10 TP22.1 | length 987.3
  Top Layer w10: J1.A10@606.54,1813.39 722.71,1813.39 782.29,1753.8 782.29,1734.74 906.1,1610.93 1369.07,1610.93 TP22.1@1370,1610
  Top Layer w15: TP22.1@1370,1622.95 1370.83,1623.78 IC7.3@1498.09,1623.78
SG+2: IC8.3 J1.A11 TP23.1 | length 1021.3
  Top Layer w10: J1.A11@606.54,1695.28 735.73,1695.28 1035.07,1395.93 1374.07,1395.93 TP23.1@1375,1395
  Top Layer w15: TP23.1@1375,1407.95 1375.83,1408.78 IC8.3@1503.09,1408.78
SG+3: IC6.3 J1.A12 TP21.1 | length 1054.3
  Top Layer w10: J1.A12@606.54,1577.17 754.01,1577.17 1145.25,1185.93 1369.07,1185.93 TP21.1@1370,1185
  Top Layer w15: TP21.1@1370,1197.95 1370.83,1198.78 IC6.3@1498.09,1198.78
SG+4: IC5.3 J1.A13 TP20.1 | length 1132.9
  Top Layer w10: J1.A13@606.54,1459.06 722.71,1459.06 936.35,1245.41 936.35,1179.83 1145.25,970.93 1369.07,970.93 TP20.1@1370,970
  Top Layer w15: TP20.1@1370,982.95 1370.83,983.78 IC5.3@1498.09,983.78
SG+5: IC4.3 J1.A14 TP19.1 | length 1219.8
  Top Layer w10: J1.A14@606.54,1340.94 722.71,1340.94 896.35,1167.3 896.35,1014.83 1145.25,765.93 1369.07,765.93 TP19.1@1370,765
  Top Layer w15: TP19.1@1370,777.95 1370.83,778.78 IC4.3@1498.09,778.78
SG+6: IC3.3 J1.A15 TP18.1 | length 1306.7
  Top Layer w10: J1.A15@606.54,1222.83 722.71,1222.83 856.35,1089.19 856.35,849.83 1145.25,560.93 1369.07,560.93 TP18.1@1370,560
  Top Layer w15: TP18.1@1370,572.95 1370.83,573.78 IC3.3@1498.09,573.78
SG+7: IC2.3 J1.A16 TP17.1 | length 1393.6
  Top Layer w10: J1.A16@606.54,1104.72 722.71,1104.72 816.35,1011.08 816.35,684.83 1145.25,355.93 1369.07,355.93 TP17.1@1370,355
  Top Layer w15: TP17.1@1370,367.95 1370.83,368.78 IC2.3@1498.09,368.78
SG+8: IC1.3 J1.A9 TP16.1 | length 1317.6
  Top Layer w10: J1.A9@704.96,927.56 704.96,586.22 1145.25,145.93 1369.07,145.93 TP16.1@1370,145
  Top Layer w15: TP16.1@1370,157.95 1370.83,158.78 IC1.3@1498.09,158.78
SG-1: IC7.2 J1.A1 TP10.1 | length 906.6
  Top Layer w10: J1.A1@704.96,1872.44 802.29,1775.11 802.29,1743.03 881.11,1664.21 1173.35,1664.21 TP10.1@1190.98,1646.57 1193.78,1649.37 IC7.2@1498.09,1649.37
SG-2: IC8.2 J1.A2 TP11.1 | length 933
  Top Layer w10: J1.A2@704.96,1754.33 1010.08,1449.21 1178.35,1449.21 TP11.1@1195.98,1431.57 1198.78,1434.37 IC8.2@1503.09,1434.37
SG-3: IC6.2 J1.A3 TP9.1 | length 966
  Top Layer w10: J1.A3@704.96,1636.22 709.61,1631.57 763.27,1631.57 1173.27,1221.57 TP9.1@1190.98,1221.57 1193.78,1224.37 IC6.2@1498.09,1224.37
SG-4: IC5.2 J1.A4 TP8.1 | length 1031.5
  Top Layer w10: J1.A4@704.96,1518.11 1155.63,1067.44 1155.63,1024.21 1173.27,1006.57 TP8.1@1190.98,1006.57 1193.78,1009.37 IC5.2@1498.09,1009.37
SG-5: IC4.2 J1.A5 TP7.1 | length 1118.4
  Top Layer w10: J1.A5@704.96,1400 916.35,1188.61 916.35,1058.49 1173.27,801.57 TP7.1@1190.98,801.57 1193.78,804.37 IC4.2@1498.09,804.37
SG-6: IC3.2 J1.A6 TP6.1 | length 1205.3
  Top Layer w10: J1.A6@704.96,1281.89 876.35,1110.5 876.35,893.49 1173.27,596.57 TP6.1@1190.98,596.57 1193.78,599.37 IC3.2@1498.09,599.37
SG-7: IC2.2 J1.A7 TP5.1 | length 1292.2
  Top Layer w10: J1.A7@704.96,1163.78 836.35,1032.39 836.35,728.49 1173.27,391.57 TP5.1@1190.98,391.57 1193.78,394.37 IC2.2@1498.09,394.37
SG-8: IC1.2 J1.A8 TP4.1 | length 1384.1
  Top Layer w10: J1.A8@704.96,1045.67 796.35,954.28 796.35,558.49 1173.27,181.57 TP4.1@1190.98,181.57 1193.78,184.37 IC1.2@1498.09,184.37
SGO1: C30.2 IC7.7 R24.2 TP41.1 U3.25 | length 1060.8
  Top Layer w10: IC7.7@1663.88,1649.37 v1@1730,1649.37 ; v1@1734.69,1654.06 v1@1730,1649.37 ; TP41.1@1782.43,1656.94 1774.86,1649.37 v1(1734.69,1649.37) v1@1730,1649.37 ; TP41.1@1790,1665.27 1790,1647.56 2046.93,1390.63 U3.25@2410.64,1390.63
  Bottom Layer w10: C30.2@1550,1663.15 1550.99,1662.16 R24.2@1609.53,1662.16 ; R24.2@1620,1666.1 1721.32,1666.1 1721.32,1665.22 1734.69,1651.86 v1(1734.69,1649.37)
  Bottom Layer w15: R24.2@1617.05,1663.15 R24.2@1620,1666.1
SGO2: C23.2 IC8.7 R16.2 TP43.1 U3.26 | length 974.9
  Top Layer w10: IC8.7@1668.88,1434.37 v1@1735,1434.37 ; v1@1739.69,1439.06 v1@1735,1434.37 ; TP43.1@1787.43,1441.94 1779.86,1434.37 v1(1739.69,1434.37) v1@1735,1434.37 ; TP43.1@1795,1450.27 1795,1432.56 1856.61,1370.94 U3.26@2410.64,1370.94
  Bottom Layer w10: C23.2@1555,1448.15 1555.99,1447.16 R16.2@1614.53,1447.16 ; R16.2@1625,1451.1 1726.32,1451.1 1726.32,1450.22 1739.69,1436.86 v1(1739.69,1434.37)
  Bottom Layer w15: R16.2@1622.05,1448.15 R16.2@1625,1451.1
SGO3: C29.2 IC6.7 R23.2 TP40.1 U3.27 | length 993
  Top Layer w10: IC6.7@1663.88,1224.37 v1@1730,1224.37 ; v1@1734.69,1229.06 v1@1730,1224.37 ; TP40.1@1782.43,1231.94 1774.86,1224.37 v1(1734.69,1224.37) v1@1730,1224.37 ; TP40.1@1790,1240.27 1790,1257.99 1883.27,1351.26 U3.27@2410.64,1351.26
  Bottom Layer w10: C29.2@1550,1238.15 1550.99,1237.16 R23.2@1609.53,1237.16 ; R23.2@1620,1241.1 1721.32,1241.1 1721.32,1240.22 1734.69,1226.86 v1(1734.69,1224.37)
  Bottom Layer w15: R23.2@1617.05,1238.15 R23.2@1620,1241.1
SGO4: C28.2 IC5.7 R22.2 TP39.1 U3.28 | length 1073.9
  Top Layer w10: IC5.7@1663.88,1009.37 v1@1730,1009.37 ; v1@1734.69,1014.06 v1@1730,1009.37 ; TP39.1@1782.43,1016.94 1774.86,1009.37 v1(1734.69,1009.37) v1@1730,1009.37 ; TP39.1@1790,1025.27 1790,1042.99 2078.59,1331.57 U3.28@2410.64,1331.57
  Bottom Layer w10: C28.2@1550,1023.15 1550.99,1022.16 R22.2@1609.53,1022.16 ; R22.2@1620,1026.1 1721.32,1026.1 1721.32,1025.22 1734.69,1011.86 v1(1734.69,1009.37)
  Bottom Layer w15: R22.2@1617.05,1023.15 R22.2@1620,1026.1
SGO5: C27.2 IC4.7 R21.2 TP38.1 U3.29 | length 1150.7
  Top Layer w10: IC4.7@1663.88,804.37 v1@1730,804.37 ; v1@1734.69,809.06 v1@1730,804.37 ; TP38.1@1782.43,811.94 1774.86,804.37 v1(1734.69,804.37) v1@1730,804.37 ; TP38.1@1790,820.27 1790,837.99 2263.9,1311.89 U3.29@2410.64,1311.89
  Bottom Layer w10: C27.2@1550,818.15 1550.99,817.16 R21.2@1609.53,817.16 ; R21.2@1620,821.1 1721.32,821.1 1721.32,820.22 1734.69,806.86 v1(1734.69,804.37)
  Bottom Layer w15: R21.2@1617.05,818.15 R21.2@1620,821.1
SGO6: C26.2 IC3.7 R20.2 TP37.1 U3.30 | length 1271.7
  Top Layer w10: IC3.7@1663.88,599.37 v1@1730,599.37 ; v1@1734.69,604.06 v1@1730,599.37 ; TP37.1@1782.43,606.94 1774.86,599.37 v1(1734.69,599.37) v1@1730,599.37 ; TP37.1@1790,615.27 1790,632.99 2090.27,933.26 2090.27,1008.79 2372.91,1291.43 2409.86,1291.43 U3.30@2410.64,1292.2
  Bottom Layer w10: C26.2@1550,613.15 1550.99,612.16 R20.2@1609.53,612.16 ; R20.2@1620,616.1 1721.32,616.1 1721.32,615.22 1734.69,601.86 v1(1734.69,599.37)
  Bottom Layer w15: R20.2@1617.05,613.15 R20.2@1620,616.1
SGO7: C25.2 IC2.7 R19.2 TP36.1 U3.31 | length 1453.6
  Top Layer w10: IC2.7@1663.88,394.37 v1@1730,394.37 ; v1@1734.69,399.06 v1@1730,394.37 ; TP36.1@1782.43,401.94 1774.86,394.37 v1(1734.69,394.37) v1@1730,394.37 ; TP36.1@1790,410.27 1790,427.99 2108.27,746.26 2108.27,1001.34 2378.68,1271.74 2409.86,1271.74 U3.31@2410.64,1272.52
  Bottom Layer w10: C25.2@1550,408.15 1550.99,407.16 R19.2@1609.53,407.16 ; R19.2@1620,411.1 1721.32,411.1 1721.32,410.22 1734.69,396.86 v1(1734.69,394.37)
  Bottom Layer w15: R19.2@1617.05,408.15 R19.2@1620,411.1
SGO8: C24.2 IC1.7 R18.2 TP35.1 U3.32 | length 1637.8
  Top Layer w10: IC1.7@1663.88,184.37 v1@1730,184.37 ; v1@1734.69,189.06 v1@1730,184.37 ; TP35.1@1782.43,191.94 1774.86,184.37 v1(1734.69,184.37) v1@1730,184.37 ; TP35.1@1790,200.27 1790,217.99 2389.06,817.05 2389.06,1251.93 2389.97,1252.83 U3.32@2410.64,1252.83
  Bottom Layer w10: C24.2@1550,198.15 1550.99,197.16 R18.2@1609.53,197.16 ; R18.2@1620,201.1 1721.32,201.1 1721.32,200.22 1734.69,186.86 v1(1734.69,184.37)
  Bottom Layer w15: R18.2@1617.05,198.15 R18.2@1620,201.1
SPLIT: C12.2 R14.2 R15.1 U4.5 | length 637.3
  Top Layer w10: v1(2526.66,2375.16) v1(2861.66,2375.16)
  Bottom Layer w10: v1(2526.66,2375.16) R14.2@2589.96,2375.16 ; R14.2@2590.44,2375.64 R14.2@2589.96,2375.16 ; U4.5@2620,2207.28 2620,2254.85 2586.66,2288.19 C12.2@2586.66,2290.16 2586.66,2371.86 R14.2@2589.96,2375.16 ; R15.1@2806.62,2375.64 2807.09,2375.16 v1(2861.66,2375.16)
STBY: R13.2 U4.8 | length 92.4
  Bottom Layer w10: U4.8@2770,2207.28 2859.14,2207.28 R13.2@2861.42,2205
TC+1: J1.A20 R4.2 R6.2 TP13.1 | length 1618.6
  Top Layer w10: v1(875,2200) 1138.91,2200 1219.18,2280.27 TP13.1@1219.18,2328.56 1472.02,2328.56 R4.2@1479.77,2336.3 1487.51,2344.04 1548.36,2344.04 R6.2@1552.77,2339.63
  Bottom Layer w10: J1.A20@488.43,1577.17 552.23,1640.97 632.91,1640.97 682.47,1690.53 717.96,1690.53 794.57,1767.13 794.57,2119.57 v1(875,2200)
TC+2: J1.A22 R3.2 R5.2 TP12.1 | length 1555.8
  Top Layer w10: v1(880,1905) 1170,1905 1216.71,1951.71 TP12.1@1216.71,2000 1469.55,2000 R3.2@1477.3,2007.74 1485.04,2015.48 1545.89,2015.48 R5.2@1550.3,2011.07
  Top Layer w30: J1.A22@477.59,1351.78 J1.A22@488.43,1340.94
  Bottom Layer w10: J1.A22@488.43,1340.94 552.23,1404.75 632.91,1404.75 691.96,1463.8 727.46,1463.8 834.57,1570.91 834.57,1859.57 v1(880,1905)
TC-1: J1.A21 R2.1 TP3.1 | length 1271.9
  Top Layer w10: TP3.1@1118.36,2163.56 1134.8,2180 1241.56,2180 R2.1@1247.77,2186.21
  Top Layer w15: v1(875,2031.07) 1046.98,2031.07 1115.64,2099.74 TP3.1@1115.64,2163.56
  Bottom Layer w10: J1.A21@488.43,1459.06 552.23,1522.86 632.91,1522.86 686.62,1576.57 722.11,1576.57 814.57,1669.02 814.57,1970.64 v1(875,2031.07)
TC-2: J1.A23 R1.1 TP2.1 | length 1192.5
  Top Layer w10: TP2.1@1115.89,1835 1133.53,1852.64 1240.29,1852.64 R1.1@1245.3,1857.65
  Top Layer w15: v1(880,1707.75) 1049.74,1707.75 1113.17,1771.18 TP2.1@1113.17,1835
  Top Layer w30: J1.A23@477.59,1233.67 J1.A23@488.43,1222.83
  Bottom Layer w10: J1.A23@488.43,1222.83 552.23,1286.64 632.91,1286.64 691.96,1345.69 727.46,1345.69 880,1498.24 v1(880,1707.75)
TCO1: TP26.1 U2.5 U2.6 U3.20 | length 1079.6
  Top Layer w10: TP26.1@1825.95,2113.16 1825.95,2095.44 1843.58,2077.8 1849.84,2077.8 2114.26,1813.38 2114.26,1754.25 2378.68,1489.83 2409.86,1489.83 U3.20@2410.64,1489.06
  Top Layer w15: U2.6@1661.52,2141.57 1661.25,2141.31 U2.5@1661.25,2116.25 1661.43,2116.07 1823.03,2116.07 TP26.1@1825.95,2113.16
TCO2: TP24.1 U1.5 U1.6 U3.21 | length 919.5
  Top Layer w10: TP24.1@1820.56,1787.51 1820.56,1769.79 2120.99,1469.37 U3.21@2410.64,1469.37
  Top Layer w15: U1.6@1659.05,1813.01 1658.78,1812.75 U1.5@1658.78,1787.69 1658.96,1787.51 TP24.1@1820.56,1787.51
TRIM: C13.2 U6.5 | length 161.1
  Bottom Layer w15: C13.2@788.96,347.91 842.11,347.91 869.67,320.36 U6.5@869.67,251.34
TXCAN: CANTX.1 U3.5 U4.1 | length 425.3
  Top Layer w10: U3.5@2705.91,1626.85 2705.91,1668.43 2709.93,1672.44 2709.93,1782.71 2727.57,1800.35 CANTX.1@2745.28,1800.35
  Top Layer w15: CANTX.1@2745.28,1800.35 2763,1800.35 2778.14,1815.48 2778.14,1899.07 2784.65,1905.58 v2(2784.65,1913.7)
  Bottom Layer w15: U4.1@2770,1992.72 2770,1936.47 2784.65,1921.82 v2(2784.65,1913.7)
VCC_3V3: C11.2 U5.17 | length 132.7
  Bottom Layer w10: U5.17@2942.85,769.41 U5.17@2945,769.41 ; U5.17@2947.61,766.8 U5.17@2945,769.41 ; C11.2@3055,731.38 3053.03,731.38 3040.31,744.09 3040.31,746.06 3016.97,769.41 U5.17@2945,769.41
VCC_OK: D1.1 R32.2 | length 138.5
  Top Layer w10: v2(667.91,2475) 673.92,2475 713.65,2514.72 D1.1@717.59,2514.72
  Bottom Layer w10: v2(667.91,2475) 667.91,2482.4 711.06,2525.55 R32.2@715,2525.55
pads on no net: J1.MH J2.4 J2.6 J2.7 J2.8 J2.9 J2.10 J2.11 P1.7 P1.9 P1.MH1 P1.MH2 U1.4 U2.4 U5.3 U5.6 U5.8 U5.9 U5.10 U5.11 U5.12 U5.13 U5.14 U5.24 U5.27 U5.28 U6.1 U6.3 U6.7 U6.8 U7.1 U7.3 U7.7 U7.8

## Polygon pours and split planes (outlines as drawn)
DGND on Int1 (GND) "DGND_L02_P006" (solid, remove dead copper, pour order 6): 255,806.77 255,490 420,490 420,0 0,0 0,2800 3500,2800 3500,0 2420.37,0 2420.37,2414.45 435,2414.45 435,1460 165,1460 165,806.77
AGND on Int1 (GND) "AGND_L02_P010" (solid, pour order 10): 300,505 447.48,505 447.48,0 2335,0 2335,2390.28 447.48,2390.28 447.48,1460 300,1460
DVCC_5V on Int2 (PWR) "DVCC_5V_L03_P008" (solid, remove dead copper, pour order 8): 3500,0 3500,2800 0,2800 0,0

## Text inside footprints (layer, text, board x,y; h text height)
D1: Top Overlay "*" at 697.59,2620 h60 r90
D2: Top Overlay "*" at 3105.28,579.37 h60 r180
D3: Top Overlay "*" at 3105.28,462.99 h60 r180
POW: Top Overlay "*" at 583.58,2621.92 h60 r90